# Altium PCB Copy of AirScoutPCBV2.0-save.PcbDoc
Units mm, origin at the board's own origin, x right, y up, seen from the top; angles counter-clockwise.
Board outline 70 x 120 mm, 4 copper layers (3V3, GND_1, 5VCC, GND_2), stack 0.603 mm thick; 61 components, 40 nets, 227 pads, 100 vias.
Unrouted connection lines stored in the file: 178.
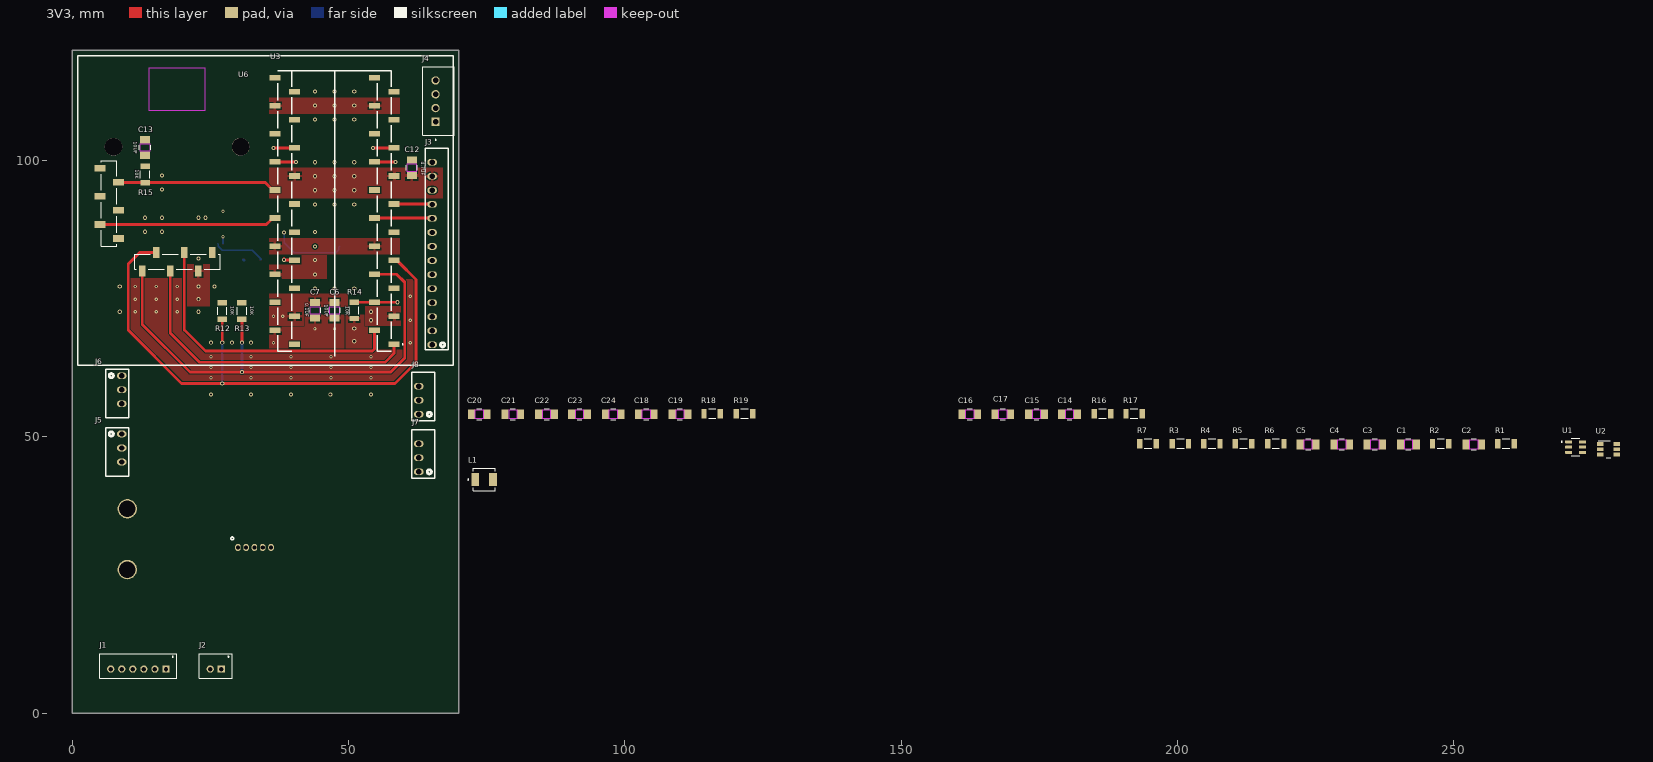
[diagram p0: 3V3 view]
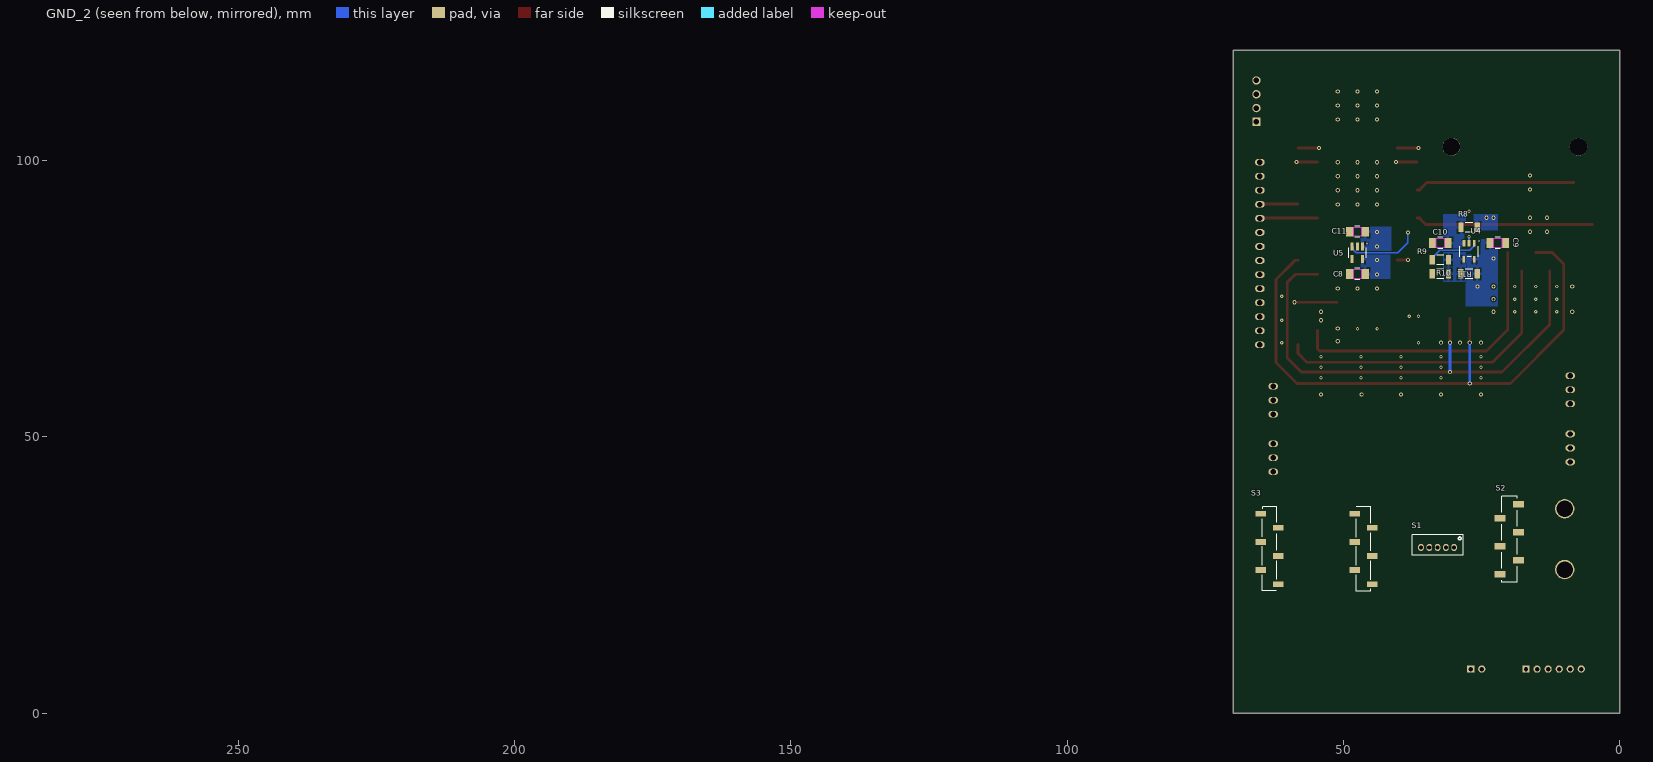
[diagram p1: GND_2 view, seen from below]

## Layer stack, top to bottom
Top Solder: solder mask 0.0102, Solder Resist, Dk 3.5
3V3: signal copper 0.0356
Dielectric 2: prepreg 0.0711, PP-006, Dk 4.1
GND_1: signal copper 0.035
Dielectric 1: dielectric 0.32, FR-4, Dk 4.8
5VCC: signal copper 0.035
Dielectric 3: prepreg 0.0711, PP-006, Dk 4.1
GND_2: signal copper 0.0356
Bottom Solder: solder mask 0.0102, Solder Resist, Dk 3.5

## Board outline
0,0 0,120 70,120 70,0

## Design rules (kind name [scope] priority, off if disabled: settings)
BoardOutlineClearance [All] p1: gap=0.3 ignorepadtopadclearanceinfootprint=FALSE except(0.4: Arc-SplitBarrior Arc-SplitContinuation Track-SplitBarrior Track-SplitContinuation SMDPad-SplitBarrior SMDPad-SplitContinuation THPad-SplitBarrior THPad-SplitContinuation Via-SplitBarrior Via-SplitContinuation Fill-SplitBarrior Fill-SplitContinuation Poly-SplitBarrior Poly-SplitContinuation Region-SplitBarrior Region-SplitContinuation Text-SplitBarrior Text-SplitContinuation)
Clearance "Clearance Different Nets" [All] p1: gap=0.2 ignorepadtopadclearanceinfootprint=FALSE except(0.089: Arc-Arc Arc-Track Arc-SMDPad Track-Track Track-SMDPad; 0.127: SMDPad-SMDPad SMDPad-Via THPad-Via Via-Via; 0.254: Arc-Via Arc-Text Track-Via Track-Text SMDPad-Text THPad-Text Via-Text Fill-Text Poly-Text Region-Text Text-Text; 0.5: THPad-THPad Via-Hole)
Clearance "Clearance Same Nets" [All] p2: gap=0.2 ignorepadtopadclearanceinfootprint=FALSE except(0.089: Arc-Arc Arc-Track Arc-SMDPad Track-Track Track-SMDPad SMDPad-SMDPad; 0.127: SMDPad-Via THPad-Via; 0.254: Arc-Via Arc-Text Track-Via Track-Text SMDPad-Text THPad-Text Via-Via Via-Text Fill-Text Poly-Text Region-Text Text-Text)
Clearance "Clearance Bottom Layer" [OnLayer('Bottom Layer')] p3: gap=0.203 ignorepadtopadclearanceinfootprint=TRUE except(0.254: Arc-Text Track-Text SMDPad-Text THPad-Text Via-Text Fill-Text Poly-Text Region-Text Text-Text)
Clearance "Clearance Top Layer" [OnLayer('Top Layer')] p4: gap=0.203 ignorepadtopadclearanceinfootprint=TRUE except(0.254: Arc-Text Track-Text SMDPad-Text THPad-Text Via-Text Fill-Text Poly-Text Region-Text Text-Text)
HoleSize [All] p1: absolutevalues=TRUE maxlimit=6.3 minlimit=0.2 maxpercent=80.000 minpercent=20.000
MinimumAnnularRing [All] p1: minimumring=0.13
MinimumSolderMaskSliver [All] p1: minsoldermaskwidth=0.1
PolygonConnect PolygonConnect_1 [All] p1: thpad.connectstyle=Relief thpad.reliefconductorwidth=0.508 thpad.reliefentries=4 thpad.polygonreliefangle="90 Angle" thpad.airgapwidth=0.254 smdpad.connectstyle=Relief smdpad.reliefconductorwidth=0.508 smdpad.reliefentries=4 smdpad.polygonreliefangle="90 Angle" smdpad.airgapwidth=0.254 via.connectstyle=Direct via.reliefconductorwidth=0.508 via.reliefentries=4 via.polygonreliefangle="90 Angle" via.airgapwidth=0.254
RoutingCorners [All] p1: cornerstyle=Round minsetback=2.54 maxsetback=2.54
RoutingVias [All] p1: holewidth=0.5 width=1 viastyle="Through Hole" minholewidth=0.2 minwidth=0.35 maxholewidth=1 maxwidth=2
SilkToSilkClearance [All] p1: silktosilkclearance=0.1
SilkToSolderMaskClearance [IsPad] p1: minsilkscreentomaskgap=0.1 clearancetoexposedcopper=TRUE
SolderMaskExpansion [All] p1: expansion=0.102 istentingtop=FALSE
SupplyNets "Schematic Supply Nets_30" [InNet('I2C/SCL')] p1: voltage=0.000
SupplyNets "Schematic Supply Nets_29" [InNet('SPI/CS-DIS')] p2: voltage=0.000
SupplyNets "Schematic Supply Nets_28" [InNet('VCC')] p3: voltage=0.000
SupplyNets "Schematic Supply Nets_27" [InNet('SPI/CS-SD')] p4: voltage=0.000
SupplyNets "Schematic Supply Nets_26" [InNet('VIN-')] p5: voltage=0.000
SupplyNets "Schematic Supply Nets_25" [InNet('5VCC')] p6: voltage=0.000
SupplyNets "Schematic Supply Nets_24" [InNet('CC1')] p7: voltage=0.000
SupplyNets "Schematic Supply Nets_23" [InNet('3V3')] p8: voltage=0.000
SupplyNets "Schematic Supply Nets_22" [InNet('FB')] p9: voltage=0.000
SupplyNets "Schematic Supply Nets_21" [InNet('UART/RX')] p10: voltage=0.000
SupplyNets "Schematic Supply Nets_20" [InNet('RST')] p11: voltage=0.000
SupplyNets "Schematic Supply Nets_19" [InNet('LED')] p12: voltage=0.000
SupplyNets "Schematic Supply Nets_18" [InNet('SPI/MISO')] p13: voltage=0.000
SupplyNets "Schematic Supply Nets_17" [InNet('ADC2')] p14: voltage=0.000
SupplyNets "Schematic Supply Nets_16" [InNet('GND')] p15: voltage=0.000
SupplyNets "Schematic Supply Nets_15" [InNet('UART/TX')] p16: voltage=0.000
SupplyNets "Schematic Supply Nets_14" [InNet('RESET')] p17: voltage=0.000
SupplyNets "Schematic Supply Nets_13" [InNet('I2C/SDA')] p18: voltage=0.000
SupplyNets "Schematic Supply Nets_12" [InNet('DC')] p19: voltage=0.000
SupplyNets "Schematic Supply Nets_11" [InNet('CONT')] p20: voltage=0.000
SupplyNets "Schematic Supply Nets_10" [InNet('TCH4')] p21: voltage=0.000
SupplyNets "Schematic Supply Nets_9" [InNet('3V3-REF')] p22: voltage=0.000
SupplyNets "Schematic Supply Nets_8" [InNet('TCH2')] p23: voltage=0.000
SupplyNets "Schematic Supply Nets_7" [InNet('TCH3')] p24: voltage=0.000
SupplyNets "Schematic Supply Nets_6" [InNet('TCH1')] p25: voltage=0.000
SupplyNets "Schematic Supply Nets_5" [InNet('CC2')] p26: voltage=0.000
SupplyNets "Schematic Supply Nets_4" [InNet('VBUS')] p27: voltage=0.000
SupplyNets "Schematic Supply Nets_3" [InNet('SPI/SCK')] p28: voltage=0.000
SupplyNets "Schematic Supply Nets_2" [InNet('EXTIN')] p29: voltage=0.000
SupplyNets "Schematic Supply Nets_1" [InNet('SPI/MOSI')] p30: voltage=0.000
SupplyNets "Schematic Supply Nets" [InNet('CHG')] p31: voltage=0.000
Width [All] p1: maxlimit=2.54 minlimit=0.089 preferedwidth=0.381
25 further rules are at their usual default settings.

## Components (designator, comment, footprint, x,y, rotation, side; value= is the part's Value field where it differs from the comment)
C1 "C1206C105K3RACTU" CAPC340180_140N_KEM 241.782,48.667 r0 top value=1uF
C2 "C1206C105K3RACTU" CAPC340180_140N_KEM 253.593,48.667 r0 top value=1uF
C3 "CL31B225KBHNNNE" CAPC340180_140N_KEM 235.686,48.667 r0 top value=2.2uF
C4 "C1206C104K5RACTU" CAPC340180_140N_KEM 229.717,48.667 r0 top value=0.1uF
C5 "CL31B475KBHNFNE" CAPC340180_140N_KEM 223.621,48.667 r0 top value=4.7uF
C6 "CL31B106KAHNNNE" CAPC340180_140N_KEM 47.498,72.898 r270 top value=10uF
C7 "C1206C104K5RACTU" CAPC340180_140N_KEM 43.942,72.898 r270 top value=0.1uF
C8 "C1206C105K3RACTU" CAPC340180_140N_KEM 47.498,79.502 r180 bottom value=1uF
C9 "CL31B106KAHNNNE" CAPC340180_140N_KEM 22.098,85.09 r0 bottom value=10uF
C10 "C1206C104K5RACTU" CAPC340180_140N_KEM 32.512,85.09 r180 bottom value=0.1uF
C11 "C1206C104K5RACTU" CAPC340180_140N_KEM 47.498,87.122 r180 bottom value=0.1uF
C12 "CL31B475KBHNFNE" CAPC340180_140N_KEM 61.468,98.685 r90 top value=4.7uF
C13 "CL31B106KAHNNNE" CAPC340180_140N_KEM 13.208,102.362 r270 top value=10uF
C14 "CL31B106KAHNNNE" CAPC340180_140N_KEM 180.467,54.102 r0 top value=10uF
C15 "CL31B106KAHNNNE" CAPC340180_140N_KEM 174.498,54.102 r0 top value=10uF
C16 "C1206C104K5RACTU" CAPC340180_140N_KEM 162.433,54.102 r0 top value=0.1uF
C17 "C1206C104K5RACTU" CAPC340180_140N_KEM 168.402,54.102 r0 top value=0.1uF
C18 "C1206C104K5RACTU" CAPC340180_140N_KEM 103.886,54.102 r0 top value=0.1uF
C19 "C1206C104K5RACTU" CAPC340180_140N_KEM 109.982,54.102 r0 top value=0.1uF
C20 "CL31B106KAHNNNE" CAPC340180_140N_KEM 73.66,54.102 r0 top value=10uF
C21 "C1206C104K5RACTU" CAPC340180_140N_KEM 79.756,54.102 r0 top value=0.1uF
C22 "CL31A476MQHNNNE" CAPC340180_140N_KEM 85.852,54.102 r0 top value=47uF
C23 "CL31B106KAHNNNE" CAPC340180_140N_KEM 91.821,54.102 r0 top value=10uF
C24 "C1206C104K5RACTU" CAPC340180_140N_KEM 97.917,54.102 r0 top value=0.1uF
J1 "B6B-PH-K-S" JST_B6B-PH-K-S 12,8.55 r0 top
J2 "B02B-PASK-1" JST_B2B-PH-K-S 26,8.55 r0 top
J3 "0705430013" CONN_14POL_SAMTEC 65.151,66.675 r270 top
J4 "4x1 vertical Connector Box" JST_B4B-XH-A 66.294,110.744 r270 top
J5 "0705430002" CONN_3POL_SAMTEC 9,50.54 r90 top
J6 "0705430002" CONN_3POL_SAMTEC 9,61.08 r90 top
J7 "0705430002" CONN_3POL_SAMTEC 62.738,43.688 r270 top
J8 "0705430002" CONN_3POL_SAMTEC 62.738,54.102 r270 top
L1 "PA4332.103NLT" IND_FDSD0420-H-100M=P3 74.549,42.291 r0 top
R1 "RC1206FR-0710KL" RESC3116X65N 259.435,48.794 r0 top value=10k
R2 "RC1206FR-0710KL" RESC3116X65N 247.624,48.794 r0 top value=10k
R3 "RMCF1206JT5K10" RESC3116X65N 200.507,48.794 r0 top value=5k1
R4 "RMCF1206JT5K10" RESC3116X65N 206.222,48.794 r0 top value=5k1
R5 "RC1206FR-0710KL" RESC3116X65N 211.937,48.794 r0 top value=10k
R6 "RNCP1206FTD1K00" RESC3116X65N 217.779,48.794 r0 top value=1k
R7 "RMCF1206JT56K0" RESC3116X65N 194.665,48.794 r0 top value=56k
R8 "RC1206FR-0710KL" RESC3116X65N 27.292,87.9 r180 bottom value=10k
R9 "RC1206JR-07200KL" RESC3116X65N 32.512,82.042 r0 bottom value=200k
R10 "RC1206JR-07220KL" RESC3116X65N 27.305,79.502 r180 bottom value=220k
R11 "RC1206JR-07220KL" RESC3116X65N 32.512,79.502 r180 bottom value=220k
R12 "RC1206FR-0710KL" RESC3116X65N 27.178,72.771 r90 top value=10k
R13 "RC1206FR-0710KL" RESC3116X65N 30.734,72.771 r90 top value=10k
R14 "RC1206FR-0710KL" RESC3116X65N 51.054,72.898 r270 top value=10k
R15 "RC1206FR-0710KL" RESC3116X65N 13.208,97.492 r90 top value=10k
R16 "RC1206FR-0710KL" RESC3116X65N 186.436,54.229 r0 top value=10k
R17 "RC1206FR-0710KL" RESC3116X65N 192.151,54.229 r0 top value=10k
R18 "RC1206FR-0710KL" RESC3116X65N 115.824,54.229 r0 top value=10k
R19 "RC1206FR-0710KL" RESC3116X65N 121.666,54.229 r0 top value=10k
S1 "B5B-ZR" CONN5_B5B-ZR_JST 30,30 r180 bottom
S2 "SSM-106-F-SV" PIM357 21.5,39.5 r270 bottom
S3 "SSM-106-F-SV" IFX-SMD-LG-MLGA-14-1-V_MODUL 66.897,20.58 r180 bottom
U1 "BQ21040DBVR" SOT95P280X145-6N 272.008,48.159 r0 top
U2 "TLV61046ADBVR" DBV0006A_M 277.977,47.778 r0 top
U3 "SSM-120-L-SV-BE-K-TR" "PicoW SC019" 47.5,91 r180 top locked
U4 "MCP6006T-E/OT" SOT23-5-AP2202K_DIO-M 27.305,83.566 r270 bottom
U5 "TCR2EF33,LM(CT" "SOT-25   SMV_TOS" 47.498,83.312 r270 bottom
U6 "FM20206VBNN; SSM-106-F-SV" CAM8MQ-Mod 5,117 r270 top locked

## Footprints (in the part's own frame and the unit in brackets; to place one, negate y for a bottom-side part, rotate by r counter-clockwise, add the part's x,y. Pads: shape width x height; smd on the part's side, far side on the other; paste and mask are expansions set on the pad)
CAM8MQ-Mod [mm] "For SMD Soldering"
  rect 1.2x2 smd paste+0 mask+0.025: 1(18.4,0.024) 2(20.94,3.376) 3(23.48,0.024) 4(26.02,3.376) 5(28.56,0.024) 6(31.1,3.376)
  rect 2x1.2 smd paste+0 mask+0.025: 7(33.624,20.4) 8(36.976,17.86) 9(33.624,15.32) 10(36.976,12.78) 11(33.624,10.24) 12(36.976,7.7)
  round 3.2 hole 3.2 unplated: MH1(14.5,25.5) MH3(14.5,2.5)
  3V3 keep-out region: 0.25,19 8,19 8,9 0.25,9
  silkscreen extent 17,0.33 36.67,21.8, body extent 17.18,-0.59 37.59,21.62, height 7.42
CAPC340180_140N_KEM [mm] "Caseform: 1206 Imperial; for Caps"
  rect 1.306x1.8 smd paste+0 mask+0: 1(-1.403,0) 2(1.403,0)
  3V3 keep-out region: -0.699,-0.849 -0.699,0.849 0.699,0.849 0.699,-0.849
  silkscreen extent -0.44,-1.03 0.44,1.03, body extent -1.7,-0.9 1.7,0.9, height 1.4
CONN5_B5B-ZR_JST [mm]
  oval 1x1.3 hole 0.737 paste-2539.97: 1(0,0) 2(-1.5,0) 3(-3,0) 4(-4.5,0) 5(-6,0)
  silkscreen extent -7.62,-1.43 1.62,2.33, body extent -7.5,-1.24 1.5,2.26, height 4.5
CONN_3POL_SAMTEC [mm] "0705430013"
  oval 1.2x1.75 hole 0.95: 1(0,0) 2(-2.54,0) 3(-5.08,0)
  silkscreen extent -7.62,-1.27 1.14,2.92, body extent -7.23,-1.27 0.88,5.08, height 5.46
CONN_14POL_SAMTEC [mm] "0705430013"
  oval 1.2x1.75 hole 0.95: 1(0,0) 2(-2.54,0) 3(-5.08,0) 4(-7.62,0) 5(-10.16,0) 6(-12.7,0) 7(-15.24,0) 8(-17.78,0) 9(-20.32,0) 10(-22.86,0) 11(-25.4,0) 12(-27.94,0) 13(-30.48,0) 14(-33.02,0)
  silkscreen extent -35.56,-1.27 0.89,2.92, body extent -35.29,-1.27 0.75,5.08, height 5.97
DBV0006A_M [mm]
  rect 1.2x0.65 smd paste+0 mask+0.051: 1(-1.475,0.95) 2(-1.475,0) 3(-1.475,-0.95) 4(1.475,-0.95) 5(1.475,0) 6(1.475,0.95)
  silkscreen extent -1.83,-1.55 0.38,1.55, body extent -1.4,-1.45 1.4,1.45, height 1.2
IFX-SMD-LG-MLGA-14-1-V_MODUL [mm] "Module, 2.54 mm Pitch, 14 Pin, 14.00 mm W X 13.80 mm L X 7.68 mm H Body"
  rect 1.905x1.02 smd: 1(1.898,15.5) 2(5.103,12.96) 3(1.898,10.42) 4(5.103,7.88) 5(1.898,5.34) 6(18.897,5.34) 7(22.102,7.88) 8(18.897,10.42) 9(22.102,12.96) 10(18.897,15.5) 11(5.103,2.8) 12(22.102,2.8)
  silkscreen extent 2.2,1.53 21.8,16.77, body extent 1.28,1.53 22.85,16.77, height 15.3
IND_FDSD0420-H-100M=P3 [mm]
  rect 1.4x2.4 smd: 1(-1.6,0) 2(1.6,0)
  silkscreen extent -3,-2 2,2, body extent -2,-2 2,2, height 2
JST_B2B-PH-K-S [mm]
  round 1.308 hole 0.8: 1(-1,-0.55)
  rect 1.308x1.308 hole 0.8: 2(1,-0.55)
  silkscreen extent -2.95,-2.25 2.95,2.25, body extent -2.95,-2.25 2.95,2.25, height 6
JST_B4B-XH-A [mm]
  rect 1.508x1.508 / inner round 1.508 / far side rect 1.508x1.508 hole 1: 1(3.75,-0.525)
  round 1.508 hole 1: 2(1.25,-0.525) 3(-1.25,-0.525) 4(-3.75,-0.525)
  silkscreen extent -6.2,-2.88 7.1,2.88, body extent -6.2,-2.88 6.2,2.88, height 7
JST_B6B-PH-K-S [mm]
  rect 1.308x1.308 hole 0.8: 1(5,-0.55)
  round 1.308 hole 0.8: 2(3,-0.55) 3(1,-0.55) 4(-1,-0.55) 5(-3,-0.55) 6(-5,-0.55)
  silkscreen extent -6.95,-2.25 6.95,2.25, body extent -6.95,-2.25 6.95,2.25, height 6
"PicoW SC019" [mm] "For Description look into Schematics"
  rect 2x1.02 smd: 1(-10.778,24.26) 2(-7.222,21.72) 3(-10.778,19.18) 4(-7.222,16.64) 5(-10.778,14.1) 6(-7.222,11.56) 7(-10.778,9.02) 8(-7.222,6.48) 9(-10.778,3.94) 10(-7.222,1.4) 11(-10.778,-1.14) 12(-7.222,-3.68) 13(-10.778,-6.22) 14(-7.222,-8.76) 15(-10.778,-11.3) 16(-7.222,-13.84) 17(-10.778,-16.38) 18(-7.222,-18.92) 19(-10.778,-21.46) 20(-7.222,-24) 21(10.778,-24) 22(7.222,-21.46) 23(10.778,-18.92) 24(7.222,-16.38) 25(10.778,-13.84) 26(7.222,-11.3) 27(10.778,-8.76) 28(7.222,-6.22) 29(10.778,-3.68) 30(7.222,-1.14) 31(10.778,1.4) 32(7.222,3.94) 33(10.778,6.48) 34(7.222,9.02) 35(10.778,11.56) 36(7.222,14.1) 37(10.778,16.64) 38(7.222,19.18) 39(10.778,21.72) 40(7.222,24.26)
  silkscreen extent -12.4,-25.27 10.27,25.53, body extent -11.41,-25.5 11.16,26.8, height 11.23
PIM357 [mm] "With BME680 Sensor"
  rect 1.2x2 smd paste+0 mask+0.025: 1(1.65,3.176) 2(4.19,-0.176) 3(6.73,3.176) 4(9.27,-0.176) 5(11.81,3.176) 6(14.35,-0.176)
  round 3.5 hole 3 unplated: MH1(2.5,11.5) MH2(13.5,11.5)
  silkscreen extent 0.25,0.1 15.75,2.87, body extent 0.38,-0.79 15.62,3.51, height 7.49
RESC3116X65N [mm] "Caseform: 1206 Imperial"
  rect 0.97x1.73 smd: 1(-1.48,0) 2(1.48,0)
  silkscreen extent -0.67,-0.85 0.67,0.85, body extent -1.55,-0.8 1.55,0.8, height 0.65
SOT23-5-AP2202K_DIO-M [mil]
  rect 47.15x20 smd paste+0 mask+0: 1(-57.08,37) 2(-57.08,0) 3(-57.08,-37) 4(57.08,-37.5) 5(57.08,37.5)
  silkscreen extent -39,-66 39,66, body extent -59,-61 59,61, height 57
SOT95P280X145-6N [mm]
  rrect25% 1.21x0.58 smd: 1(-1.255,0.95) 2(-1.255,0) 3(-1.255,-0.95) 4(1.255,-0.95) 5(1.255,0) 6(1.255,0.95)
  silkscreen extent -2.6,-1.56 0.8,1.56, body extent -1.4,-1.45 1.4,1.45, height 1.45
"SOT-25   SMV_TOS" [mil]
  rect 56x22 smd paste+0 mask+0: 1(-45.06,37.4) 2(-45.06,0) 3(-45.06,-37.4) 4(45.06,-37.4) 5(45.06,37.4)
  silkscreen extent -37,-62 37,62, body extent -55,-57 55,57, height 45

## Part data
C1 C2 C8: library part CAP, "CAP CER 1UF 25V X7R 1206"
C3: library part CAP, "CAP CER 2.2UF 50V X7R 1206"
C4 C7 C10 C11 C16 C17 C18 C19 C21 C24: library part CAP, "CAP CER 0.1UF 50V X7R 1206"
C5 C12: library part CAP, "CAP CER 4.7UF 50V X7R 1206"
C6 C9 C13 C14 C15 C20 C23: library part CAP, "CAP CER 10UF 25V X7R 1206"
C22: library part CAP, "CAP CER 47UF 6.3V X5R 1206"
J1: library part CON6x1, "CONN HEADER VERT 6POS 2MM"
J2: library part CON2x1_vertical, "CONN HEADER VERT 2POS 2MM"
J3: library part CON7x2, "CONN HEADER VERT 14POS 2.54MM"
J4: library part "CON 4x1", "Can be used to create connectivity between two plates with cables or similar."
J5 J6 J7 J8: library part "CON 3x1", "CONN HEADER VERT 3POS 2.54MM"
L1: library part Inductor, "FIXED IND 10UH 2A 216 MOHM SMD;  / AIUR-05-100K"
R1 R2 R5 R8 R12 R13 R14 R15 R16 R17 R18 R19: library part RES, "RES 10K OHM 1% 1/4W 1206"
R3 R4: library part RES, "RES 5.1K OHM 5% 1/4W 1206"
R6: library part RES, "RES 1K OHM 1% 1/2W 1206"
R7: library part RES, "RES 56K OHM 5% 1/4W 1206"
R9: library part RES, "RES 200K OHM 5% 1/4W 1206"
R10 R11: library part RES, "RES 220K OHM 5% 1/4W 1206"
S1: library part "SPS30 Module", "Plug: CONN HEADER VERT 5POS 1.5MM; Air Sensor Dust Sensor Box SPS30 Module: 1649-1106-ND", ComponentLink1Description=Datasheet, ComponentLink1URL=https://sensirion.com/media/documents/8600FF88/64A3B8D6/Sensirion_PM_Sensors_Datasheet_SPS30.pdf, ComponentLink2Description="EU Component", ComponentLink2URL=https://www.digikey.at/en/products/detail/sensirion-ag/SPS30/9598990?gclsrc=aw.ds&gad_source=1&gad_campaignid=9415055229&gbraid=0AAAAADrbLlghU28cdFM9RQIiS448Os4NQ&gclid=Cj0KCQjwzt_FBhCEARIsAJGFWVladtv1vxGMu0RXHFTM9ng6qsDvV838Q-BR2Fl5FYFzWahIkC0y_aYaAqE3EALw_wcB
S2: library part "BME680 Module", "Header: CONN RCPT 6POS 0.1 GOLD SMD; Sensor: EVAL BOARD BME680 SENSOR - Gas, Feuchtigkeit, Druck, Temperatur Evaluierungsboards - Sensoren", ComponentLink1Description=Datasheet, ComponentLink1URL=chrome-extension://efaidnbmnnnibpcajpcglclefindmkaj/https://mm.digikey.com/Volume0/opasdata/d220001/medias/docus/854/PIM357_Web.pdf
S3: library part "PASCO2V15 Module", "(2x) CONN RCPT 6POS 0.1 GOLD SMD; Sensor: EVALCO25VMINIBOARDTOBO1; EVAL BOARD", Alternate View=No, ComponentLink1Description=Datasheet, ComponentLink1URL=chrome-extension://efaidnbmnnnibpcajpcglclefindmkaj/https://www.infineon.com/assets/row/public/documents/24/49/infineon-pasco2v01-datasheet-en.pdf?fileId=8ac78c8c80027ecd01809278f1af1ba2, Multiple Parts=No, Symbol Type="XENSIV PAS CO2 1.5"
U1: "OVP (Over-Voltage-Protection), SCP (Short-Circuit- Protection), OTP (Over - Temp. - Prot.); 1-cell, 0.8-A Li-ion and Li-polymer battery charger", Package="SOT-23-6 Texas Instruments", Check_prices=https://www.snapeda.com/parts/BQ21040DBVR/Texas+Instruments/view-part/?ref=eda, MF="Texas Instruments", MP=BQ21040DBVR, SnapEDA_Link=https://www.snapeda.com/parts/BQ21040DBVR/Texas+Instruments/view-part/?ref=snap
U2: "28-V Output Voltage Boost Converter with Power Diode and Isolation Switch 6-SOT-23 -40 to 125", Manufacturer_Name="Texas Instruments", Copyright="Copyright (C) 2025 Ultra Librarian. All rights reserved.", Manufacturer_Part_Number=TLV61046ADBVR, RefDes=RefDes, Type=TYPE
U3: library part "Raspberry PicoW SC019 Module", "(2x) CONN RCPT 20POS 0.1 GOLD SMD; PicoW: SC0918; RASPBERRY PI PICO W RP2040", ComponentLink1Description="EU Component", ComponentLink1URL=https://www.reichelt.at/at/de/shop/produkt/raspberry_pi_pico_rp2040_cortex-m0_microusb-295706, ComponentLink2Description=Datasheet, ComponentLink2URL=chrome-extension://efaidnbmnnnibpcajpcglclefindmkaj/https://datasheets.raspberrypi.com/picow/pico-w-datasheet.pdf
U4: "IC OPAMP GP 1 CIRCUIT SOT23-5"
U5: library part TCR2EF33,LMCT, "IC REG LINEAR 3.3V 200MA SMV", Manufacturer_Name="Toshiba Electronic Devices & Storage Corp.", Copyright="Copyright (C) 2025 Ultra Librarian. All rights reserved.", Manufacturer_Part_Number=TCR2EF33,LM(CT, RefDes=RefDes, Type=Type
U6: library part "CAM-M8Q Module", "(2x) RECEPTACLE, SMT, SINGLE ROW, .10; GPS - Module:  201880; CAM-M8Q-BREAKOUT MULTI GNSS MODU", ComponentLink1Description="Datasheet IC", ComponentLink1URL=chrome-extension://efaidnbmnnnibpcajpcglclefindmkaj/https://content.u-blox.com/sites/default/files/CAM-M8-FW3_DataSheet_%28UBX-15031574%29.pdf

## Via types
v1: diameter 0.75, hole 0.4, 3V3 to GND_2, 66 vias
v2: diameter 0.6, hole 0.3, 3V3 to GND_2, 34 vias

## Nets (pads, with @x,y where several pads share a name; then routed paths per layer and width w, separated by ;. In a path a pad name is that pad's centre, name@x,y a point inside that pad or via, vN(x,y) a via of type N, cw(c..) or ccw(c..) an arc to the next point about the centre after c; other vN are vias at no path point)
3V3: C12.2 C13.2 C14.2 C20.2 C21.2 J3.14 J5.1 J6.1 J7.1 J8.1 R12.2 R13.2 R14.2 R15.2 S2.1 S3.1 U3.36 U6.1 U6.7
  other v1: 25.146,57.658 32.385,57.658 39.624,57.658 46.736,57.658 54.102,57.658 25.146,67.056 28.956,67.056 32.385,67.056 51.054,67.31 51.054,69.596 8.636,72.644 22.86,72.644 43.942,76.835 47.498,76.835 51.054,76.835 8.636,77.216 13.208,87.122 16.256,87.122 13.208,89.662 16.256,89.662 43.946,92.078 47.502,92.078 51.058,92.078 16.256,94.742 16.256,97.282 43.946,99.698 47.502,99.698 51.058,99.698 43.942,107.442 47.498,107.442 51.054,107.442 43.942,112.522 47.498,112.522 51.054,112.522
3V3-REF: C8.2 U3.35 U5.5
  other v1: 43.942,79.375 43.942,81.994
5VCC: C5.2 C6.2 C7.2 C9.2 C11.2 C15.2 C22.2 C23.2 C24.2 R1.2 R10.2 S1.1 S3.10 U2.5 U3.39 U4.5 U5.1
  other v1: 25.781,77.216 22.86,82.296 43.942,84.455 43.942,87.06
  other v2: 36.449,67.056 43.942,69.596 47.498,69.596
ADC2: R9.2 U3.34 U4.1 | length 11.9
  3V3 w0.508: v1@38.354,82.296 v1(38.354,82.042) 38.419,82.042 38.467,81.994 U3.34@40.278,81.994
  GND_2 w0.254: U4.1 26.492,84.889 26.492,84.506 27.178,83.82 32.594,83.82 34.246,82.168 34.246,82.042 R9.2
CC1: J1.3 R3.2
CC2: J1.5 R4.2
CHG: R2.1 R14.1 U3.4 | length 7.8
  3V3 w0.508: R14.1@51.181,74.378 51.199,74.36 U3.4 v1(58.866,74.36) v1@58.928,74.422
CONT: U3.32 U5.3 | length 13.4
  GND_2 w0.254: v1(38.354,86.995) 38.354,85.169 40.211,83.312 47.752,83.312 48.296,83.856 48.296,84.304 U5.3
DC: J3.10 U3.10 | length 10.5
  3V3 w0.508: U3.10 65.086,89.6 J3.10
EXTIN: U3.31 U6.5 | length 32.2
  3V3 w0.508: U6.5 35.14,88.44 35.976,89.276 35.976,89.344 36.232,89.6 U3.31
FB: R1.1 R7.2 U2.3
GND: C1.1 C2.1 C3.1 C4.1 C5.1 C6.1 C7.1 C8.1 C9.1 C10.1 C11.1 C12.1 C13.1 C14.1 C15.1 C16.1 C17.1 C18.1 C19.1 C20.1 C21.1 C22.1 C23.1 C24.1 J1.6 J2.2 J3.13 J5.3 J6.3 J7.3 J8.3 R3.1 R4.1 R5.1 R6.1 R7.1 R11.1 S1.5 S2.2 S3.6 U1.5 U2.2 U3.3 U3.8 U3.13 U3.18 U3.23 U3.28 U3.33 U3.38 U4.2 U5.2 U6.8 | length 1.2
  GND_2 w0.4: U4.2 v2(27.305,86.233)
  other v1: 54.102,71.12 54.102,72.644 22.86,74.93 22.86,77.216 43.946,94.618 47.502,94.618 51.058,94.618 43.946,97.158 47.502,97.158 51.058,97.158 43.942,109.982 47.498,109.982 51.054,109.982
  other v2: 25.146,60.706 32.385,60.706 39.624,60.706 46.863,60.706 54.102,60.706 25.146,62.611 32.385,62.611 39.624,62.611 46.863,62.611 54.102,62.611 25.146,64.516 32.385,64.516 39.624,64.516 46.863,64.516 54.102,64.516 61.214,67.056 61.214,71.12 36.449,71.82 38.1,71.82 11.43,72.644 15.24,72.644 19.05,72.644 11.43,74.93 15.24,74.93 19.05,74.93 61.214,75.438 11.43,77.216 15.24,77.216 19.05,77.216 27.305,90.818
I2C/SCL: R12.1 S1.3 S2.3 S3.3 U3.7 U6.11 | length 107.7
  3V3 w0.508: U6.11 12.256,83.376 10.16,81.28 10.16,69.342 19.812,59.69 58.42,59.69 62.23,63.5 62.23,78.486 59.024,81.692 59.024,81.724 58.768,81.98 U3.7 ; v1(27.178,67.056) R12.1@27.178,71.418
  GND_2 w0.508: v1(27.178,59.69) v1(27.178,67.056)
I2C/SDA: R13.1 S1.2 S2.4 S3.4 U3.6 U6.12 | length 91.3
  3V3 w0.508: U6.12 12.7,70.358 21.336,61.722 57.658,61.722 60.198,64.262 60.198,77.978 58.736,79.44 U3.6 ; v1(30.734,67.056) R13.1@30.734,71.418
  GND_2 w0.508: v1(30.734,61.722) v1(30.734,67.056)
LED: J3.7 U3.9
NetC4_2: C4.2 R2.2 U1.3
NetC10_2: C10.2 R8.1 U4.3
NetC16_2: C16.2 J5.2 R16.1
NetC17_2: C17.2 J6.2 R17.1
NetC18_2: C18.2 J7.2 R18.1
NetC19_2: C19.2 J8.2 R19.1
NetL1_2: L1.2 U2.1
NetR5_2: R5.2 U1.1
NetR6_2: R6.2 U1.4
RESET: R15.1 U3.29 U6.2 | length 28.9
  3V3 w0.508: U6.2 R15.1@13.462,96.06 ; R15.1@13.462,96.012 34.968,96.012 35.976,95.004 35.976,94.936 36.232,94.68 U3.29
RST: J3.11 U3.11 | length 7.2
  3V3 w0.508: U3.11 64.624,92.14 64.816,91.948 65.024,91.948 J3.11@65.278,92.202
SPI/CS-DIS: J3.12 U3.19
SPI/CS-SD: J4.4 U3.20
SPI/MISO: J3.6 J4.2 U3.21
SPI/MOSI: J3.9 J4.3 U3.25
SPI/SCK: J3.8 J4.1 U3.24
TCH1: R16.2 U3.26 | length 3.8
  3V3 w0.508: v1(36.463,102.3) U3.26
TCH2: R17.2 U3.27 | length 3.8
  3V3 w0.508: U3.27 v1(40.537,99.76)
TCH3: R18.2 U3.14 | length 3.8
  3V3 w0.508: U3.14 v1(58.537,99.76)
TCH4: R19.2 U3.15 | length 3.8
  3V3 w0.508: v1(54.463,102.3) U3.15
UART/RX: U3.2 U6.9 | length 53.5
  3V3 w0.508: U6.9 20.32,69.342 24.13,65.532 54.356,65.532 54.722,65.898 U3.2
UART/TX: U3.1 U6.10 | length 56.2
  3V3 w0.508: U6.10 17.78,68.834 23.114,63.5 56.642,63.5 58.278,65.136 U3.1
VBUS: C1.2 J1.1 U1.6
VCC: C2.2 C3.2 J2.1 L1.1 R8.2 U1.2 U2.4 U2.6
  other v1: 22.86,89.662 24.13,89.662
VIN-: R9.1 R10.1 R11.2 U4.4 | length 0.1
  GND_2 w0.508: R9.1 R9.1@31.094,81.98
pads on no net: J1.2 J1.4 J3.1 J3.2 J3.3 J3.4 J3.5 S1.4 S2.5 S2.6 S2.MH1 S2.MH2 S3.2 S3.5 S3.7 S3.8 S3.9 S3.11 S3.12 U3.5 U3.12 U3.16 U3.17 U3.22 U3.30 U3.37 U3.40 U5.4 U6.3 U6.4 U6.6 U6.MH1 U6.MH3

## Polygon pours and split planes (outlines as drawn)
3V3-REF on 3V3 "NONET_L-01_P-001" (solid, pour order 29): 41.529,82.931 46.101,82.931 46.101,81.153 41.529,81.153
GND on 3V3 "NONET_L-01_P-001" (solid, pour order 0): 35.687,70.104 35.687,75.946 41.91,75.946 41.91,70.104
GND on 3V3 "NONET_L-01_P-001" (solid, pour order 1): 20.828,81.28 24.892,81.28 24.892,73.66 20.828,73.66
GND on 3V3 "NONET_L-01_P-001" (solid, pour order 3): 18.034,78.74 20.066,78.74 20.066,69.342 24.13,65.278 54.356,65.278 54.864,65.786 57.912,65.786 57.912,65.024 56.642,63.754 23.114,63.754 18.034,68.834
GND on 3V3 "NONET_L-01_P-001" (solid, pour order 4): 10.668,78.74 10.668,69.342 20.32,59.69 58.42,59.69 62.23,63.5 62.23,78.486 59.69,78.486 60.198,77.978 60.198,64.262 57.658,61.722 21.336,61.722 12.7,70.358 12.7,78.74
GND on 3V3 "NONET_L-01_P-001" (solid, pour order 5): 18.034,68.58 14.478,68.58 21.336,61.722 57.658,61.722 60.198,64.262 60.198,65.786 58.278,65.786 58.278,65.136 56.642,63.5 23.114,63.5
GND on 3V3 "NONET_L-01_P-001" (solid, pour order 7): 18.288,68.326 17.78,68.834 17.78,78.74 12.7,78.74 12.7,70.358 14.732,68.326
5VCC on 3V3 "NONET_L-01_P-001" (solid, pour order 8): 41.91,72.136 49.276,72.136 49.276,66.04 35.687,66.04 35.687,70.104 41.91,70.104
GND on 3V3 "NONET_L-01_P-001" (solid, pour order 9): 43.347,73.597 49.911,73.597 49.911,75.946 48.26,75.946 41.91,75.946 41.91,73.597
GND on 3V3 "NONET_L-01_P-001" (solid, pour order 10): 53.086,73.66 59.436,73.66 59.436,70.104 53.086,70.104
3V3 on 3V3 "NONET_L-01_P-001" (solid, pour order 11): 49.276,72.136 54.356,72.136 54.356,66.04 49.276,66.04
GND on 3V3 "NONET_L-01_P-001" (solid, pour order 12): 35.687,85.979 59.309,85.979 59.309,83.058 35.687,83.058
3V3-REF on 3V3 "NONET_L-01_P-001" (solid, pour order 13): 35.687,81.153 46.101,81.153 46.101,78.613 35.687,78.613
GND on 3V3 "NONET_L-01_P-001" (solid, pour order 14): 59.313,95.761 35.691,95.761 35.691,98.682 59.313,98.682
GND on 3V3 "NONET_L-01_P-001" (solid, pour order 16): 35.687,95.866 35.687,93.218 67.056,93.218 67.056,98.679 59.313,98.679 59.313,98.421 59.313,95.886
GND on 3V3 "NONET_L-01_P-001" (solid, pour order 17): 35.687,111.379 59.309,111.379 59.309,108.458 35.687,108.458
3V3-REF on GND_2 "NONET_L-01_P-001" (solid, pour order 28): 46.863,82.931 46.863,78.613 41.529,78.613 41.529,82.931
5VCC on GND_2 "NONET_L-01_P-001" (solid, pour order 27): 46.863,83.693 46.863,88.011 41.402,88.011 41.402,83.693
VCC on GND_2 "NONET_L-01_P-001" (solid, pour order 24): 26.416,87.376 22.098,87.376 22.098,90.297 26.416,90.297
5VCC on GND_2 "NONET_L-01_P-001" (solid, pour order 23): 22.098,85.725 22.098,82.804 25.146,82.804 25.146,85.725
VIN- on GND_2 "NONET_L-01_P-001" (solid, pour order 21): 27.94,78.105 27.94,83.439 32.004,83.439 32.004,78.105
5VCC on GND_2 "NONET_L-01_P-001" (solid, pour order 22): 27.94,82.931 22.098,82.931 22.098,73.66 27.94,73.66
NetC10_2 on GND_2 "NONET_L-01_P-001" (solid, pour order 19): 27.94,85.852 27.94,83.82 32.004,83.82 32.004,90.297 27.94,90.297

## Silkscreen, mask and mechanical layers (free items; w line width, h text height)
Top Overlay:
  lines w0.254: 39.77,116.27 55.23,116.27 ; 47.498,64.643 47.5,64.645 47.5,116.27 ; 1,63 69,63 69,119 1,119 1,63
  text "10UF" at 10.922,103.378 h1 r270
  text "4.7UF" at 62.865,99.822 h1 r270
  text "10K" at 11.176,98.298 h1 r270
  text "0.1UF" at 41.91,74.168 h1 r270
  text "10UF" at 45.466,73.914 h1 r270
  text "10K" at 28.448,73.66 h1 r270
  text "10K" at 32.004,73.66 h1 r270
  text "10K" at 49.276,73.66 h1 r270
Mechanical 15:
  lines w0.254: 35,0 35,119 ; 0,0 70,0 70,120 0,120 0,0

## Text inside footprints (layer, text, board x,y; h text height)
U4: Mechanical 13 "*" at 25.781,85.598 h0.51 r90; Bottom Overlay "*" at 25.781,85.598 h0.51 r90
U5: Mechanical 13 "*" at 46.101,85.09 h0.51 r90; Bottom Overlay "*" at 46.101,85.09 h0.51 r90
U6: Mechanical 15 "GPS-Module" at 11.684,112.014 h1.52